# EAGLE board Uni_Seriell (EAGLE 9.6.2)
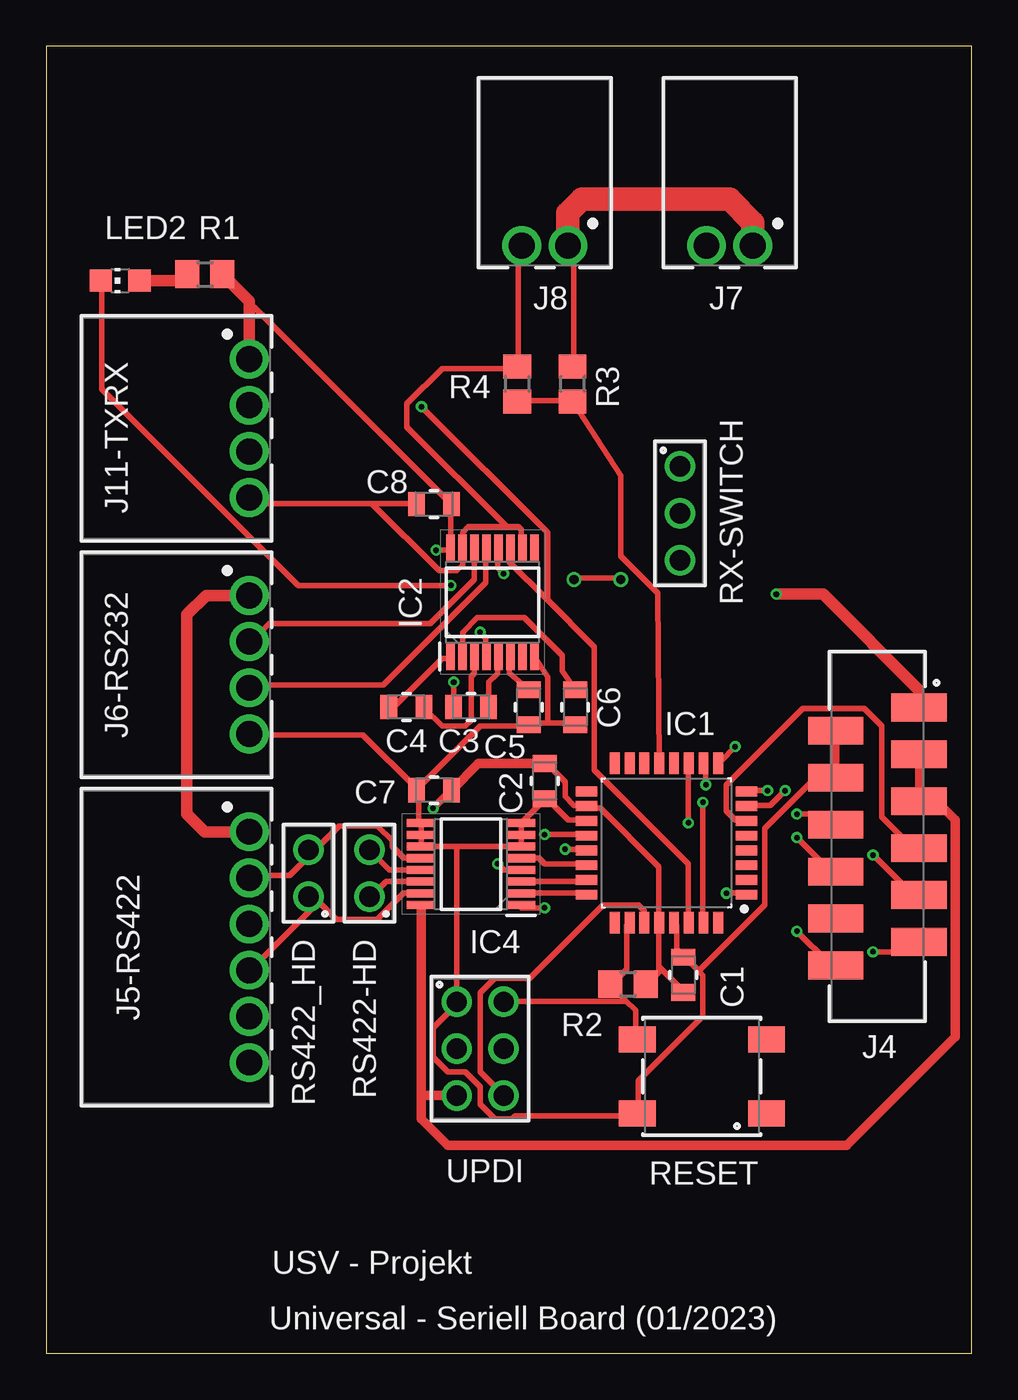
[diagram p0: board, top side]
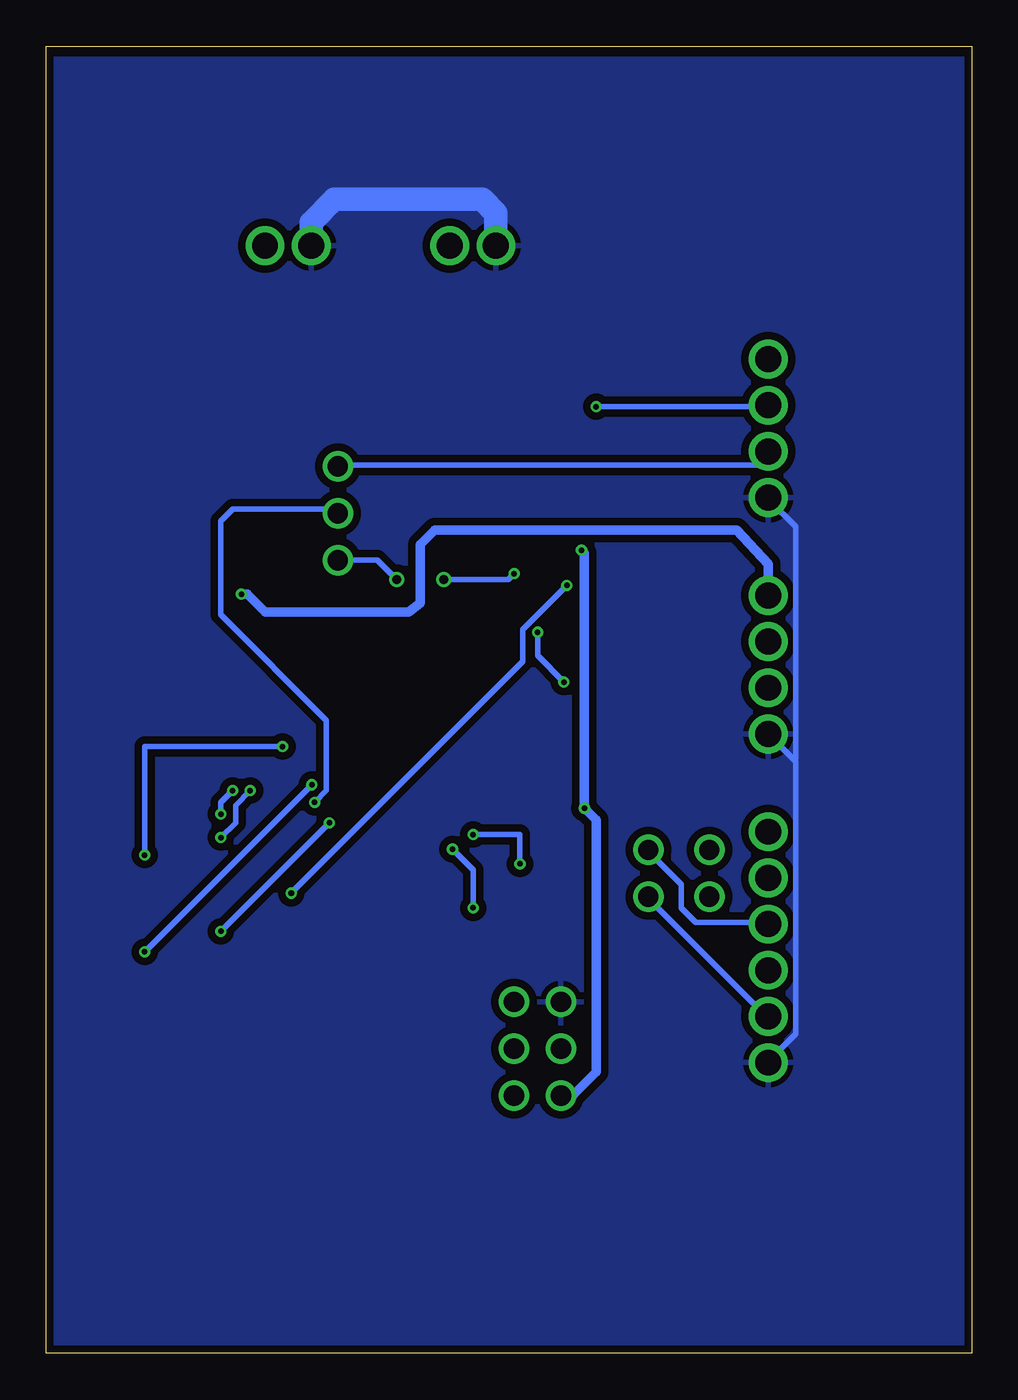
[diagram p1: board, bottom side, seen from below]

Size 50.1 x 70.8 mm. Coordinates in mm from the lower left corner, seen from the top.
Outline: 0,0 50.1,0 50.1,70.8 0,70.8 0,0
Copper layers (1*16): Top 0.035mm / dielectric 1.6mm / Bottom 0.035mm
Design rules "default *": minimum track width 0.3mm, minimum drill 0.3mm, track to track 0.2mm, track to pad 0.2mm, pad to pad 0.2mm, via to via 0.2mm, smd to smd 0.2mm, copper to edge 0.2mm, drill to drill 0.2mm, minimum pad ring 0.15mm, minimum via ring 0.15mm, stop-mask expansion 0.075mm, vias tented up to drill 0mil, thermal gap 0.3mm

## Footprints (pad centres in the part's own frame; a part is rotated, then mirrored left to right if it is on the bottom)
WCAP-CSST_0805 = smd 0.9 x 1.3: 1 -0.95,0; 2 0.95,0
QFP80P900X900X120-32N = smd 1.161 x 0.532: 1 -4.326,2.8; 2 -4.326,2; 3 -4.326,1.2; 4 -4.326,0.4; 5 -4.326,-0.4; 6 -4.326,-1.2; 7 -4.326,-2; 8 -4.326,-2.8; 17 4.326,-2.8; 18 4.326,-2; 19 4.326,-1.2; 20 4.326,-0.4; 21 4.326,0.4; 22 4.326,1.2; 23 4.326,2; 24 4.326,2.8 | smd 0.532 x 1.161: 9 -2.8,-4.326; 10 -2,-4.326; 11 -1.2,-4.326; 12 -0.4,-4.326; 13 0.4,-4.326; 14 1.2,-4.326; 15 2,-4.326; 16 2.8,-4.326; 25 2.8,4.326; 26 2,4.326; 27 1.2,4.326; 28 0.4,4.326; 29 -0.4,4.326; 30 -1.2,4.326; 31 -2,4.326; 32 -2.8,4.326
SOP65P640X110-16N = smd 1.475 x 0.45: 1 -2.938,2.275; 2 -2.938,1.625; 3 -2.938,0.975; 4 -2.938,0.325; 5 -2.938,-0.325; 6 -2.938,-0.975; 7 -2.938,-1.625; 8 -2.938,-2.275; 9 2.938,-2.275; 10 2.938,-1.625; 11 2.938,-0.975; 12 2.938,-0.325; 13 2.938,0.325; 14 2.938,0.975; 15 2.938,1.625; 16 2.938,2.275
SOP64P601X175-16N = smd 1.526 x 0.435: 1 -2.712,2.222; 2 -2.712,1.588; 3 -2.712,0.952; 4 -2.712,0.318; 5 -2.712,-0.318; 6 -2.712,-0.952; 7 -2.712,-1.588; 8 -2.712,-2.222; 9 2.712,-2.222; 10 2.712,-1.588; 11 2.712,-0.952; 12 2.712,-0.318; 13 2.712,0.318; 14 2.712,0.952; 15 2.712,1.588; 16 2.712,2.222
690367291276 = smd 1.5 x 3: 1 6.985,-2.25; 2 5.715,2.25; 3 4.445,-2.25; 4 3.175,2.25; 5 1.905,-2.25; 6 0.635,2.25; 7 -0.635,-2.25; 8 -1.905,2.25; 9 -3.175,-2.25; 10 -4.445,2.25; 11 -5.715,-2.25; 12 -6.985,2.25
691382010006 = drill 1.4: 1 -6.25,0; 2 -3.75,0; 3 -1.25,0; 4 1.25,0; 5 3.75,0; 6 6.25,0
691382010004 = drill 1.4: 1 -3.75,0; 2 -1.25,0; 3 1.25,0; 4 3.75,0
691382010002 = drill 1.4: 1 -1.25,0; 2 1.25,0
CHIP-LED0805 = smd 1.2 x 1.2: A 0,-1.05; C 0,1.05
R0805 = smd 1.3 x 1.5: 1 -0.95,0; 2 0.95,0
430481031816 = smd 2 x 1.4: 1 -3.5,2; 2 3.5,2; 3 -3.5,-2; 4 3.5,-2
61300211121 = drill 1.1: 1 -1.27,0; 2 1.27,0
61300311121 = drill 1.1: 1 -2.54,0; 2 0,0; 3 2.54,0
61300621121 = drill 1.1: 1 -2.54,-1.27; 2 -2.54,1.27; 3 0,-1.27; 4 0,1.27; 5 2.54,-1.27; 6 2.54,1.27

## Placement (x,y rotation side)
C1  100nF  [WCAP-CSST_0805]  34.5,20.5 270 top
C2  100nF  [WCAP-CSST_0805]  27,31 90 top
C3  100nF  [WCAP-CSST_0805]  23,35 180 top
C4  100nF  [WCAP-CSST_0805]  19.5,35 180 top
C5  100nF  [WCAP-CSST_0805]  26.14,35 90 top
C6  100nF  [WCAP-CSST_0805]  28.64,35 270 top
C7  100nF  [WCAP-CSST_0805]  21,30.5 180 top
C8  100nF  [WCAP-CSST_0805]  21,46 0 top
IC1  ATMEGA4808-AU  [QFP80P900X900X120-32N]  33.59,27.64 180 top
IC2  MAX3232ECUE+  [SOP65P640X110-16N]  24.16,40.68 90 top
IC4  LTC2855HGN#TRPBF  [SOP64P601X175-16N]  23,26.5 180 top
J4  690367291276  [690367291276]  45,28 90 top
J5-RS422  691382010006  [691382010006]  11,22 270 top
J6-RS232  691382010004  [691382010004]  11,37.3 270 top
J7  691382010002  [691382010002]  37,60 180 top
J8  691382010002  [691382010002]  27,60 180 top
J11-TXRX  691382010004  [691382010004]  11,50.1 270 top
LED2  [CHIP-LED0805]  4,58.1 90 top
R1  270  [R0805]  8.59,58.45 0 top
R2  10 k  [R0805]  31.5,20 0 top
R3  100k  [R0805]  28.5,52.5 90 top
R4  10k  [R0805]  25.5,52.5 270 top
RESET  430481031816  [430481031816]  35.5,15 180 top
RS422-HD  61300211121  [61300211121]  17.5,26 90 top
RS422_HD  61300211121  [61300211121]  14.2,26 90 top
RX-SWITCH  61300311121  [61300311121]  34.31,45.5 270 top
UPDI  61300621121  [61300621121]  23.5,16.5 270 top

## Library data of the parts
C1-C8 = Eagle_WCAP-CSST (rev20a); CERAMIC-TYPE: X7R Class II; DATASHEET-URL: https://www.we-online.com/catalog/datasheet/885382207007.pdf; DF: 2.50%; H: 1.25mm; OPERATING-TEMPERATURE: -55 / +125°C; PART-NUMBER: 885382207007; RISO: 5GOhm; TECHNICAL-REFERENCE: X7R0805104K050DFCT1S000; TOL-C: +/- 10%; VR: 50V(DC)
IC1 = ATMEGA4808-AU; DESCRIPTION: 8-bit Microcontrollers - MCU 20MHz, 48KB, TQFP; HEIGHT: 1.2mm; MANUFACTURER_NAME: Microchip; MANUFACTURER_PART_NUMBER: ATMEGA4808-AU; MOUSER_PART_NUMBER: 556-ATMEGA4808-AU; MOUSER_PRICE-STOCK: https://www.mouser.co.uk/ProductDetail/Microchip-Technology-Atmel/ATMEGA4808-AU?qs=P1JMDcb91o4OSr3c6aXxLg%3D%3D
IC2 = MAX3232ECUE+; ARROW_PART_NUMBER: MAX3232ECUE+; ARROW_PRICE-STOCK: https://www.arrow.com/en/products/max3232ecue/maxim-integrated?region=nac; DESCRIPTION: MAX3232ECUE+, Line Transceiver, EIA/TIA-232, RS-232, V.24, V.28 2 2 2 250 kbit/s, 3 5.5 V, 16-Pin TSSOP; HEIGHT: 1.1mm; MANUFACTURER_NAME: Maxim Integrated; MANUFACTURER_PART_NUMBER: MAX3232ECUE+; MOUSER_PART_NUMBER: 700-MAX3232ECUE; MOUSER_PRICE-STOCK: https://www.mouser.co.uk/ProductDetail/Maxim-Integrated/MAX3232ECUE%2b?qs=CDqwynd4ZNpmT%2FV4ySc5XQ%3D%3D
IC4 = LTC2855HGN#TRPBF; ARROW_PART_NUMBER: LTC2855HGN#TRPBF; ARROW_PRICE-STOCK: https://www.arrow.com/en/products/ltc2855hgntrpbf/analog-devices?region=nac; DESCRIPTION: Single Transmitter/Receiver RS-422/RS-485 Automotive 16-Pin SSOP N T/R; HEIGHT: 1.75mm; MANUFACTURER_NAME: Analog Devices; MANUFACTURER_PART_NUMBER: LTC2855HGN#TRPBF; MOUSER_PART_NUMBER: 584-LTC2855HGN#TRPBF; MOUSER_PRICE-STOCK: https://www.mouser.co.uk/ProductDetail/Analog-Devices/LTC2855HGNTRPBF?qs=hVkxg5c3xu8VZzRcM9aCcw%3D%3D
J4 = Wurth_Connectors_WR-MM; DATASHEET-URL: https://www.we-online.com/catalog/datasheet/690367291276.pdf; GENDER: Female; IR: 1.5A; PACKAGING: Tape and Reel; PART-NUMBER: 690367291276; PINS: 12; PITCH: 2.54; TYPE: Straight
J5-RS422 = Wurth_Connectors_WR-TBL Pluggable Connector; DATASHEET-URL: https://www.we-online.com/catalog/datasheet/691382010006.pdf; IR-UL: 12A; MOUNT: THT; PART-NUMBER: 691382010006; PINS: 6; PITCH: 2.5mm; TYPE: Horizontal; WORKING-VOLTAGE-UL: 300V (AC)
J6-RS232 J11-TXRX = Wurth_Connectors_WR-TBL Pluggable Connector; DATASHEET-URL: https://www.we-online.com/catalog/datasheet/691382010004.pdf; IR-UL: 12A; MOUNT: THT; PART-NUMBER: 691382010004; PINS: 4; PITCH: 2.5mm; TYPE: Horizontal; WORKING-VOLTAGE-UL: 300V (AC)
J7 J8 = Wurth_Connectors_WR-TBL Pluggable Connector; DATASHEET-URL: https://www.we-online.com/catalog/datasheet/691382010002.pdf; IR-UL: 12A; MOUNT: THT; PART-NUMBER: 691382010002; PINS: 2; PITCH: 2.5mm; TYPE: Horizontal; WORKING-VOLTAGE-UL: 300V (AC)
LED2 = led
R1-R4 = rcl; SPICEPREFIX: R
RESET = Eagle_WS-TASV (rev22b); DATASHEET-URL: https://www.we-online.com/redexpert/spec/430481031816?ae; H: 3.1mm; OPERATION-FORCE: 160g; PART-NUMBER: 430481031816; QTY: 2000
RS422-HD RS422_HD = Eagle_WR-PHD (rev22a); DATASHEET-URL: https://www.we-online.com/redexpert/spec/61300211121?ae; GENDER: Pin Header; IR: 3A; MOUNT: THT; PACKAGING: Bag; PART-NUMBER: 61300211121; PINS: 2; PITCH: 2.54mm; ROWS: Single; TYPE: Straight
RX-SWITCH = Wurth_Connectors_WR-PHD; DATASHEET-URL: https://www.we-online.com/redexpert/spec/61300311121?ae; GENDER: Pin Header; IR: 3A; MOUNT: THT; PACKAGING: Bag; PART-NUMBER: 61300311121; PINS: 3; PITCH: 2.54mm; ROWS: Single; TYPE: Straight
UPDI = Wurth_Connectors_WR-PHD; DATASHEET-URL: https://www.we-online.com/redexpert/spec/61300621121?ae; GENDER: Pin Header; IR: 3A; MOUNT: THT; PACKAGING: Bag; PART-NUMBER: 61300621121; PINS: 6; PITCH: 2.54mm; ROWS: Dual; TYPE: Board Stacker

## Nets
+3.3V: C1.2 C2.2 C7.1 C8.2 IC1.18 IC1.28 IC2.16 IC4.16 J4.3 J4.5 J11-TXRX.1 R1.2 R2.2 UPDI.5
+5V: J4.1 J5-RS422.1 J6-RS232.1
CTS: IC1.9 J4.9
DE-RS422: IC1.23 IC4.3
ERR1: IC1.10 J4.11
ERR2: IC1.11 J4.12
GND: C1.1 C2.1 C5.1 C6.2 C7.2 C8.1 IC1.19 IC1.29 IC2.8 IC2.10 IC2.15 IC4.6 IC4.7 IC4.8 IC4.9 IC4.10 IC4.11 J4.2 J4.4 J5-RS422.6 J6-RS232.4 J7.2 J8.2 J11-TXRX.4 R4.1 RESET.2 UPDI.1
N$2: IC1.13 R3.1 R4.2
N$3: IC1.1 LED2.C
N$7: LED2.A R1.1
N$9: C5.2 IC2.6
N$10: C6.1 IC2.2
N$11: C3.2 IC2.4
N$12: C3.1 IC2.5
N$13: C4.1 IC2.3
N$14: C4.2 IC2.1
RE-RS422: IC1.24 IC4.2
RESET: IC1.26 R2.1 RESET.4 UPDI.2
RTS: IC1.8 J4.8
RX+: IC4.15 J5-RS422.4 RS422_HD.1
RX-: IC4.14 J5-RS422.5 RS422-HD.1
RX-3.3: J11-TXRX.3 RX-SWITCH.1
RX-4808: IC1.31 RX-SWITCH.2
RX-J6: IC2.13 J6-RS232.3
RX-RS232: IC2.12 RX-SWITCH.3
RX-RS422: IC1.21 IC4.1
RX_J5: IC1.7 J4.6
TE-RS422: IC1.22 IC4.5
TX+: IC4.12 J5-RS422.2 RS422_HD.2
TX-: IC4.13 J5-RS422.3 RS422-HD.2
TX-J6: IC2.14 J6-RS232.2
TX-RS232: IC1.30 IC2.11 J11-TXRX.2
TX-RS422: IC1.20 IC4.4
TX_J5: IC1.6 J4.7
UPDI: IC1.27 UPDI.6
VCC24: J7.1 J8.1 R3.2

## Tracks (layer width: path | path; a pad name or v marks a point on that pad's centre or on a via)
+3.3V  (via drill 0.3)
  Top 0.3: 33.18,20.95 33.18,20.64 32.54,20 R2.2 | 33.18,20.95 33.18,23.18 IC1.28 33.18,23.34 33.18,26.35 30,29.53 29.37,29.53 IC1.18 29.21,29.69 28.57,29.69 28.1,30.16 28.1,30.96 27.15,31.9 | 33.18,20.95 34.45,19.68 C1.2 | 27.15,31.91 27.15,31.9 | 22.07,30.64 C7.1 21.91,30.48 | 26.99,31.91 C2.2 27.25,32 27.15,31.9 | 11,56.67 11.27,56.67 21.91,46.04 C8.2 21.91,45.88 21.91,43.66 IC2.16 21.75,43.5 v21.11,43.5 | 47.31,30 J4.5 47.31,29.84 48.26,29.84 | 47.31,32.38 J4.3 | 20.32,24.13 IC4.16
  Top 0.406: v20.95,29.53 21.91,30.48
  Top 0.508: 47.31,32.38 47.31,30 | 20.32,24.13 20.32,13.97 | 20.32,13.97 20.32,13.34 20.32,12.7 21.75,11.27 43.34,11.27 49.21,17.14 49.21,28.89 48.26,29.84 | UPDI.5 20.33,13.96 20.32,13.97 | C7.1 23.4,31.95 C2.2
  Top 0.61: J11-TXRX.1 11,56.67 11,56.99 R1.2
  Bottom 0.3: 20.95,43.34 v21.11,43.5
  Bottom 0.508: 20.95,43.34 v20.95,29.53 20.32,28.89 20.32,15.24 21.6,13.96 UPDI.5
+5V  (via drill 0.3)
  Top 0.61: J5-RS422.1 8.58,28.25 7.62,29.21 7.62,40.01 8.66,41.05 J6-RS232.1 | J4.1 47.25,35.94 42.07,41.12 v39.53,41.12
  Bottom 0.508: v39.53,41.12 39.21,41.12 38.24,40.14 30.48,40.14 29.84,40.64 29.84,43.81 29.06,44.6 12.7,44.6 11,42.75 J6-RS232.1
CTS  (via drill 0.3)
  Top 0.3: v37.31,32.86 36.51,32.07 IC1.9 | v44.77,26.99 46.83,24.92 47.15,24.92 J4.9
  Bottom 0.3: v37.31,32.86 44.77,32.86 v44.77,26.99
DE-RS422
  Top 0.3: IC1.23 29.21,25.56 IC4.3
ERR1  (via drill 0.3)
  Top 0.3: v35.72,30.8 35.72,31.91 IC1.10 | v44.77,21.75 46.67,21.75 47.15,22.23 J4.11
  Bottom 0.3: v44.77,21.75 v35.72,30.8
ERR2  (via drill 0.3)
  Top 0.3: v34.77,28.73 34.77,31.91 IC1.11 | v40.64,22.86 42.39,21.11 42.7,21.11 J4.12
  Bottom 0.3: v40.64,22.86 v34.77,28.73
GND
  Top 0.3: 42.7,31.27 J4.4 42.55,31.27 41.75,31.27 38.89,28.42 38.89,24.29 35.4,20.8 35.32,20.72 | 42.7,33.66 J4.2 | IC1.29 34.13,23.18 34.13,21.91 34.45,21.59 C1.1 34.61,21.43 35.32,20.72 | 35.32,20.72 35.56,20.48 35.56,18.26 32.07,14.76 32.07,13.02 RESET.2 31.91,12.86 25.4,12.86 25.24,12.7 24.29,12.7 23.5,13.49 23.5,14.45 22.7,15.24 21.75,15.24 20.95,16.03 20.95,17.62 22.23,18.89 UPDI.1 22.23,27.46 | J8.2 25.72,59.85 25.56,59.69 25.56,53.5 R4.1 25.4,53.34 21.43,53.34 19.53,51.44 19.53,50.16 24.92,44.77 | 24.92,44.77 25.56,44.77 25.72,44.61 25.72,43.66 IC2.10 | 24.92,44.77 22.86,44.77 22.54,44.45 22.54,43.66 IC2.15 22.54,43.5 22.54,42.7 22.23,42.39 21.27,42.39 17.62,46.04 | 17.62,46.04 11.27,46.04 11.11,46.2 J11-TXRX.4 | 17.62,46.04 20,46.04 C8.1 | 27.15,34.13 28.57,34.13 C6.2 | 27.15,34.13 26.51,34.13 26.19,34.13 C5.1 26.04,33.97 23.5,33.97 20.16,30.64 C7.2 | 27.15,34.13 27.15,36.64 IC2.8 | C7.2 20.16,30.48 20.16,28.73 IC4.9 20.32,28.57 20.32,28.1 IC4.10 20.32,27.94 20.32,27.46 IC4.11 20.48,27.46 22.23,27.46 | IC1.19 29.21,28.89 28.26,28.89 27.15,30 C2.1 26.99,30 25.72,28.73 IC4.8 25.72,28.57 IC4.7 25.72,27.94 25.72,27.46 IC4.6 25.56,27.46 22.23,27.46 | J6-RS232.4 11.11,33.5 17.14,33.5 20,30.64 C7.2
  Top 0.508: 42.7,33.66 42.7,31.27
  Bottom 0.3: 9.6,32.15 10.95,33.5 J6-RS232.4 | 9.6,32.15 9.53,32.07 9.53,17.3 10.95,15.88 J5-RS422.6 | J11-TXRX.4 10.95,46.2 9.53,44.77 9.53,32.23 9.6,32.15
  Bottom 1.27: J8.2 25.75,61.75 26.5,62.5 34.5,62.5 35.75,61.25 J7.2
  pour Bottom (isolate 0.406): 0.3,70.1 49.68,70.1 49.68,0.3 0.3,0.3
N$2
  Top 0.3: IC1.13 33.12,41.18 31.11,43.18 31.11,47.54 R3.1 28.42,51.59 25.56,51.59 R4.2
N$3  (via drill 0.3)
  Top 0.3: v36.83,24.92 37.78,24.92 IC1.1 | v21.91,41.59 13.65,41.59 3.02,52.23 3.02,57.94 LED2.C
  Bottom 0.3: v36.83,24.92 24.29,37.47 24.29,39.21 v21.91,41.59
N$7
  Top 0.61: R1.1 7.29,58.1 LED2.A
N$9
  Top 0.3: C5.2 25.08,36.86 25.08,37.62 IC2.6
N$10
  Top 0.3: C6.1 27.94,36.95 27.94,37.78 25.88,39.85 23.34,39.85 22.54,39.05 22.54,37.78 IC2.2
N$11  (via drill 0.3)
  Top 0.3: v22.07,36.35 22.07,35.08 C3.2 | v23.5,39.05 23.81,38.73 23.81,37.78 IC2.4
  Bottom 0.3: v22.07,36.35 23.5,37.78 v23.5,39.05
N$12
  Top 0.3: C3.1 23.95,36.27 23.97,36.35 24.45,36.83 24.45,37.62 IC2.5
N$13
  Top 0.3: C4.1 20.48,34.92 21.43,33.97 22.7,33.97 23.02,34.29 23.02,36.67 23.18,36.83 23.18,37.62 IC2.3
N$14
  Top 0.3: C4.2 18.57,35.08 18.89,35.08 21.43,37.62 21.75,37.62 IC2.1
RE-RS422
  Top 0.3: IC1.24 29.21,24.92 25.72,24.92 IC4.2
RESET
  Top 0.3: IC1.26 31.43,23.18 31.43,20.8 30.64,20 R2.1 30.64,19.84 31.35,19.13 | 31.35,19.13 31.91,18.57 31.91,17.14 RESET.4 | UPDI.2 24.92,19.05 31.27,19.05 31.35,19.13
RTS  (via drill 0.3)
  Top 0.3: v39.05,30.48 37.94,30.48 IC1.8 | v40.64,27.94 42.39,26.19 42.7,26.19 J4.8
  Bottom 0.3: v39.05,30.48 39.85,29.69 39.85,28.73 v40.64,27.94
RX+
  Top 0.3: IC4.15 20.16,24.92 19.37,24.92 17.94,23.5 15.72,23.5 14.76,24.45 14.66,24.34 | 14.66,24.34 RS422_HD.1 | 14.66,24.34 11.11,20.8 J5-RS422.4
RX-
  Top 0.3: IC4.14 20.16,25.56 18.41,25.56 17.62,24.77 RS422-HD.1
  Bottom 0.3: RS422-HD.1 17.46,24.61 11.11,18.26 J5-RS422.5
RX-3.3
  Bottom 0.3: RX-SWITCH.1 34.29,48.1 11.11,48.1 11.11,48.74 J11-TXRX.3
RX-4808  (via drill 0.3)
  Top 0.3: v35.56,29.84 35.56,23.34 IC1.31
  Bottom 0.3: v35.56,29.84 34.92,30.48 34.92,34.29 40.64,40.01 40.64,45.09 40.01,45.72 34.53,45.72 RX-SWITCH.2
RX-J6
  Top 0.3: IC2.13 23.81,43.5 23.81,41.75 18.26,36.2 11.11,36.2 J6-RS232.3
RX-RS232  (via drill 0.3, 0.5)
  Top 0.3: v24.77,42.23 24.45,42.55 24.45,43.5 IC2.12 | v28.57,41.91 28.75,42 31,42 v31.11,41.91
  Bottom 0.3: v24.77,42.23 25.08,41.91 v28.57,41.91 | v31.11,41.91 32.16,42.96 RX-SWITCH.3
RX-RS422  (via drill 0.3)
  Top 0.3: v28.1,27.3 29.21,27.3 IC1.21 | v26.99,24.13 25.72,24.13 IC4.1
  Bottom 0.3: v28.1,27.3 26.99,26.19 v26.99,24.13
RX_J5  (via drill 0.3)
  Top 0.3: v40.01,30.48 39.21,29.69 37.94,29.69 IC1.7 | v40.64,29.21 42.23,29.21 42.7,28.73 J4.6
  Bottom 0.3: v40.01,30.48 40.64,29.84 v40.64,29.21
TE-RS422
  Top 0.3: IC1.22 29.21,26.51 26.99,26.51 26.67,26.83 IC4.5
TX+
  Top 0.3: IC4.12 20.16,26.83 19.37,26.83 18.73,27.46 18.73,27.78 17.94,28.57 15.88,28.57 14.76,27.46 RS422_HD.2 13.91,26.61 13.18,25.88 11.11,25.88 J5-RS422.2
TX-
  Top 0.3: IC4.13 20.16,26.19 18.57,26.19 17.62,27.15 RS422-HD.2
  Bottom 0.3: RS422-HD.2 17.46,27.15 15.72,25.4 15.72,24.13 14.92,23.34 11.11,23.34 J5-RS422.3
TX-J6
  Top 0.3: IC2.14 23.18,43.5 23.18,41.91 20.8,39.53 12.06,39.53 11.11,38.58 J6-RS232.2
TX-RS232  (via drill 0.3)
  Top 0.3: 27.07,40.88 25.08,42.86 25.08,43.5 IC2.11 | 27.07,40.88 29.69,38.26 29.69,31.59 34.77,26.51 34.77,23.34 IC1.30 | v20.32,51.28 27.15,44.45 27.15,40.96 27.07,40.88
  Bottom 0.3: v20.32,51.28 11.11,51.28 J11-TXRX.2
TX-RS422  (via drill 0.3)
  Top 0.3: v26.99,28.1 29.21,28.1 IC1.20 | v24.45,26.51 24.77,26.19 25.56,26.19 IC4.4
  Bottom 0.3: v26.99,28.1 24.45,28.1 v24.45,26.51
TX_J5
  Top 0.3: IC1.6 37.78,28.89 37.31,28.89 36.83,29.37 36.83,30.8 40.96,34.92 44.29,34.92 45.24,33.97 45.24,29.05 46.83,27.46 47.15,27.46 J4.7
UPDI
  Top 0.3: IC1.27 32.38,23.34 32.38,23.97 32.07,24.29 30.16,24.29 26.19,20.32 24.29,20.32 23.5,19.53 23.5,15.24 UPDI.6
VCC24
  Top 0.3: R3.2 28.57,53.5 28.57,59.53 J8.1
  Top 1.27: J8.1 28.25,61.75 29,62.5 37,62.5 38.25,61.25 J7.1

## Text on the board
tNames: USV - Projekt | Universal - Seriell Board (01/2023)